# Altium PCB MinSystem.PcbDoc
Units mil, origin at the board's own origin, x right, y up, seen from the top; angles counter-clockwise.
Board outline 2240 x 2025 mil, 2 copper layers (Top Layer, Bottom Layer); 36 components, 50 nets, 170 pads, 8 vias.
Unrouted connection lines stored in the file: 48.
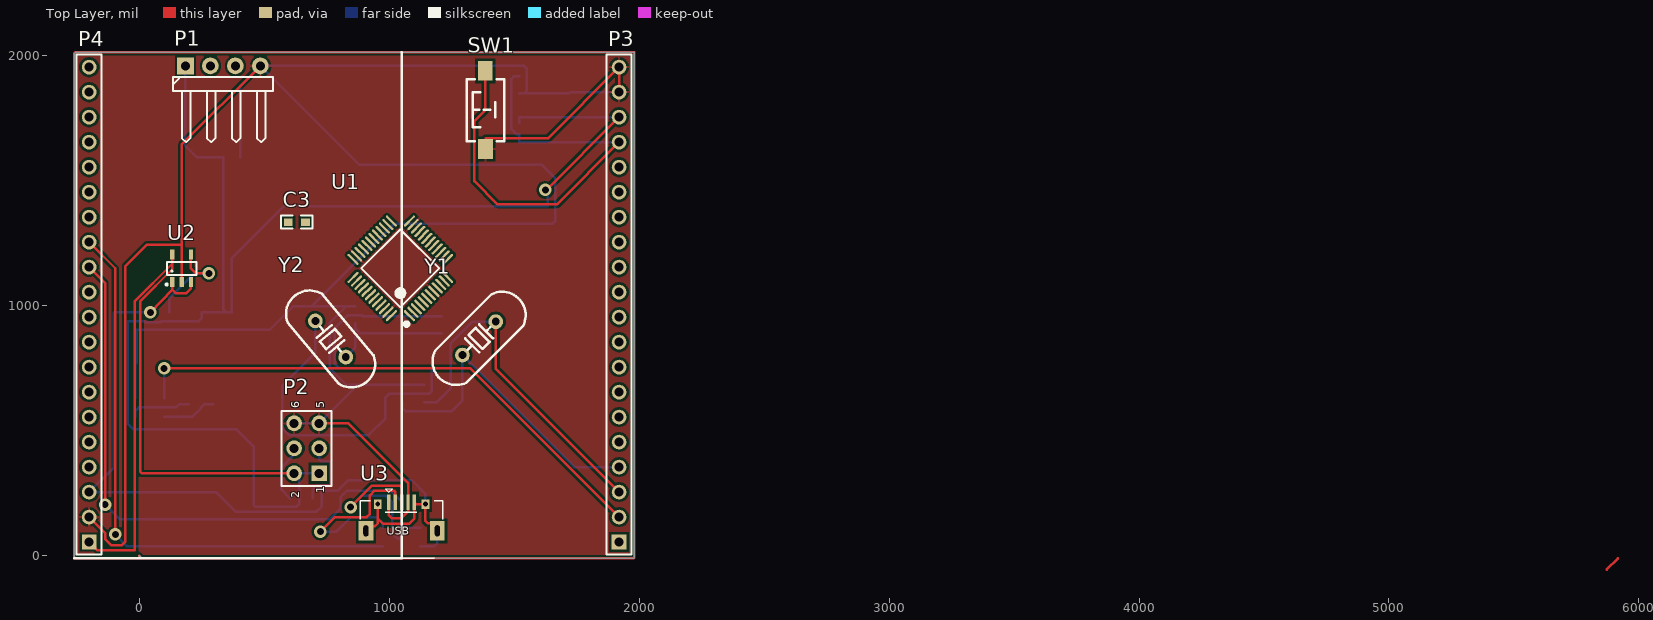
[diagram p0: Top Layer view]
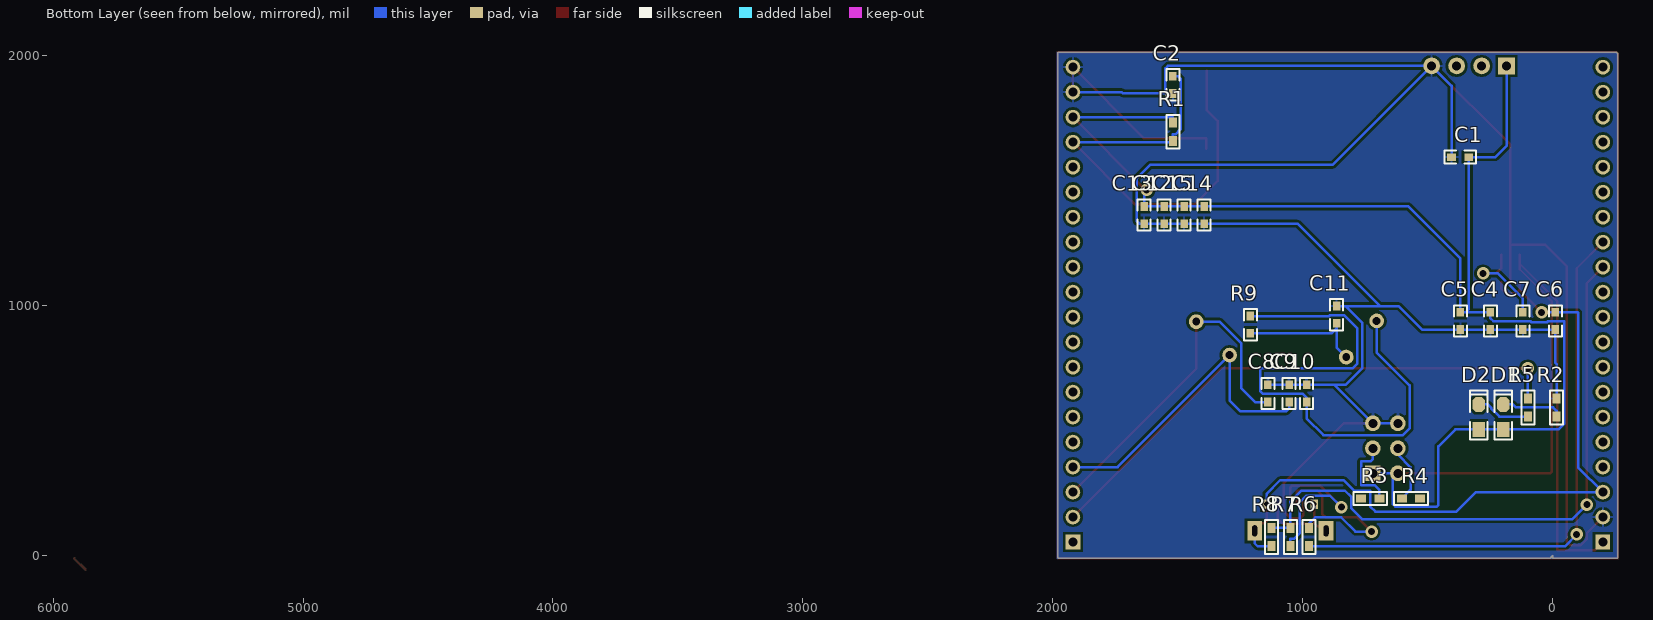
[diagram p1: Bottom Layer view, seen from below]

## Layer stack, top to bottom
Top Solder: solder mask 0.4, Solder Resist, Dk 3.5
Top Layer: signal copper 1.4
Dielectric 1: dielectric 12.6, FR-4, Dk 4.8
Bottom Layer: signal copper 1.4
Bottom Solder: solder mask 0.4, Solder Resist, Dk 3.5

## Board outline
-260,-10 -260,2010 -255,2015 1980,2015 1980,-8.5 1978.5,-10 10,-10 0,0 0,-10

## Design rules (kind name [scope] priority, off if disabled: settings)
Clearance [All] p1: gap=10 ignorepadtopadclearanceinfootprint=FALSE except(0: Arc-Hole Track-Hole SMDPad-Hole THPad-Hole Via-Hole Fill-Hole Poly-Hole Region-Hole Text-Hole)
PolygonConnect [All] p1: connectstyle=Relief reliefconductorwidth=10 reliefentries=4 polygonreliefangle="90 Angle" airgapwidth=10
RoutingVias [All] p1: holewidth=28 width=50 viastyle="Through Hole" minholewidth=28 minwidth=50 maxholewidth=28 maxwidth=50
SolderMaskExpansion [All] p1: expansion=4 istentingtop=FALSE
Width [All] p1: maxlimit=10 minlimit=10 preferedwidth=10
30 further rules are at their usual default settings.

## Components (designator, comment, footprint, x,y, rotation, side; value= is the part's Value field where it differs from the comment)
C1 "105 C0603" "C 0603" 370,1595 r180 bottom value=104
C2 "105 C0603" "C 0603" 1520,1885 r90 bottom value=104
C3 "105 C0603" "C 0603" 631,1335 r0 top value=104
C4 "105 C0603" "C 0603" 249.5,940 r90 bottom value=104
C5 "105 C0603" "C 0603" 369.5,940 r90 bottom value=104
C6 "105 C0603" "C 0603" -10.5,940 r90 bottom value=104
C7 "105 C0603" "C 0603" 119.5,940 r90 bottom value=104
C8 "22P,0603" "C 0603" 1140,650 r90 bottom value=104
C9 "22P,0603" "C 0603" 1055,650 r90 bottom value=104
C10 "22P,0603" "C 0603" 985,650 r90 bottom value=104
C11 "22P,0603" "C 0603" 865,965 r90 bottom value=104
C12 "105 C0603" "C 0603" 1555,1364 r90 bottom value=104
C13 "105 C0603" "C 0603" 1635,1364 r90 bottom value=104
C14 "105 C0603" "C 0603" 1395,1364 r90 bottom value=104
C15 "105 C0603" "C 0603" 1475,1364 r90 bottom value=104
D1 "LED" "LED 0805G" 198,556 r90 bottom
D2 "LED" "LED 0805G" 296,556 r90 bottom
P1 "SWD" HDR-1X4_H 185,1960 r0 top
P2 "Header 3X2" HDR-3X2 720,330 r90 top
P3 "Header 20" HDR1X20 1920,55 r90 top locked
P4 "Header 20" HDR1X20 -200,55 r90 top locked
R1 "10K R0603" "R 0603" 1520,1696.5 r90 bottom
R2 "10K R0603" "R 0603" -15,593.5 r90 bottom
R3 "10K R0603" "R 0603" 730.63,230 r180 bottom
R4 "10K R0603" "R 0603" 567.63,230 r180 bottom
R5 "10K R0603" "R 0603" 100,593.5 r90 bottom
R6 "20R,0603" "R 0603" 975,75 r270 bottom
R7 "20R0603" "R 0603" 1050,75 r90 bottom
R8 "4.7K,0603" "R 0603" 1125,75 r90 bottom
R9 "1M0603" "C 0603" 1210,925 r90 bottom
SW1 "SW-PB_V" "TSW SMD-3*6*2.5" 1385,1785 r90 top
U1 "stm32f103c8t6_48pin" "TQFP48 7x7_L" 1045,1150 r45 top
U2 "RT9193" SOT23-5L 170,1150 r0 top
U3 "USB-mrico" USB-micro_B 1050,100 r0 top
Y1 "32.768K" "XTAL-49S DIP" 1360,870 r45 top
Y2 "8M" "XTAL-49S DIP" 765.74,867.62 r130 top

## Footprints (in the part's own frame and the unit in brackets; to place one, negate y for a bottom-side part, rotate by r counter-clockwise, add the part's x,y. Pads: shape width x height; smd on the part's side, far side on the other; paste and mask are expansions set on the pad)
"C 0603" [mil] "无极性贴片电容"
  rect 35x30 smd: 1(-35,0) 2(34,0)
  silkscreen extent -63,-26 62,26, body extent -31,-16 31,16, height 32
HDR1X20 [mm] "Connector; Header; 20 Position"
  rect 1.5x1.5 hole 0.9: 1(0,0)
  round 1.5 hole 0.9: 2(2.54,0) 3(5.08,0) 4(7.62,0) 5(10.16,0) 6(12.7,0) 7(15.24,0) 8(17.78,0) 9(20.32,0) 10(22.86,0) 11(25.4,0) 12(27.94,0) 13(30.48,0) 14(33.02,0) 15(35.56,0) 16(38.1,0) 17(40.64,0) 18(43.18,0) 19(45.72,0) 20(48.26,0)
  silkscreen extent -1.27,-1.27 49.53,1.27
HDR-1X4_H [mm] "弯脚排针，4脚"
  rect 1.7x1.7 hole 0.9: 1(0,0)
  round 1.7 hole 0.9: 2(2.54,0) 3(5.08,0) 4(7.62,0)
  silkscreen extent -1.27,-7.76 8.89,-1.14, body extent -1.27,-7.77 8.89,1.27, height 4.85
HDR-3X2 [mm] "双排排针，3x2脚"
  rect 1.6x1.6 hole 0.9: 1(0,0)
  round 1.6 hole 0.9: 2(0,2.54) 3(2.54,0) 4(2.54,2.54) 5(5.08,0) 6(5.08,2.54)
  silkscreen extent -1.27,-1.27 6.35,3.81, body extent -1.27,-1.27 6.35,3.81, height 8.5
"LED 0805G" [mil] "绿色0805LED"
  rect 60x50 smd: 1(-50,0)
  oct 60x50 smd: 2(50,0)
  silkscreen extent -90,-35 105,35, body extent -39,-25 39,25, height 32
"R 0603" [mil] "1/10W贴片电阻"
  rect 40x31.5 smd: 1(-36.5,0) 2(36.5,0)
  silkscreen extent -68,-26 68,26, body extent -31,-16 31,16, height 16
SOT23-5L [mm] "3x1.6x1.1mm(长宽高)"
  rect 0.45x1 smd: 1(-0.95,-1.4) 2(0,-1.4) 3(0.95,-1.4) 4(0.95,1.4) 5(-0.95,1.4)
  silkscreen extent -1.6,-1.73 1.5,0.66, body extent -1.5,-1.4 1.5,1.4, height 1.15
"TQFP48 7x7_L" [mm] "48脚，体宽：7x7mm, 脚距：0.5mm"
  oval 0.25x1.5 smd: 1(-2.75,-4.046) 2(-2.25,-4.046) 3(-1.75,-4.046) 4(-1.25,-4.046) 5(-0.75,-4.046) 6(-0.25,-4.046) 7(0.25,-4.046) 8(0.75,-4.046) 9(1.25,-4.046) 10(1.75,-4.046) 11(2.25,-4.046) 12(2.75,-4.046) 25(2.75,4.046) 26(2.25,4.046) 27(1.75,4.046) 28(1.25,4.046) 29(0.75,4.046) 30(0.25,4.046) 31(-0.25,4.046) 32(-0.75,4.046) 33(-1.25,4.046) 34(-1.75,4.046) 35(-2.25,4.046) 36(-2.75,4.046)
  oval 1.5x0.25 smd: 13(4.046,-2.75) 14(4.046,-2.25) 15(4.046,-1.75) 16(4.046,-1.25) 17(4.046,-0.75) 18(4.046,-0.25) 19(4.046,0.25) 20(4.046,0.75) 21(4.046,1.25) 22(4.046,1.75) 23(4.046,2.25) 24(4.046,2.75) 37(-4.046,2.75) 38(-4.046,2.25) 39(-4.046,1.75) 40(-4.046,1.25) 41(-4.046,0.75) 42(-4.046,0.25) 43(-4.046,-0.25) 44(-4.046,-0.75) 45(-4.046,-1.25) 46(-4.046,-1.75) 47(-4.046,-2.25) 48(-4.046,-2.75)
  silkscreen extent -3.68,-4.57 2.79,2.79, body extent -4.5,-4.5 4.5,4.5, height 1.05
"TSW SMD-3*6*2.5" [mm] "3*6*2.5mm"
  rect 2x1.5 smd: 1(-3.996,-0.02) 2(3.937,0)
  silkscreen extent -3.21,-1.9 3.09,1.9, body extent -4,-1.88 4,1.62, height 2.59
USB-micro_B [mm] "micro型USB ，5.7*7.8*2.5mm"
  rect 0.35x1.6 smd: 1(-1.3,2.9) 2(-0.65,2.9) 3(0,2.9) 4(0.65,2.9) 5(1.3,2.9)
  rect 1.5x2 hole 0.5 slot 1.1 at 90 deg: 5(-3.625,0) 5(3.625,0)
  rect 0.8x1 hole 0.5: 5(-2.425,2.71) 5(2.425,2.71)
  silkscreen extent -4.19,-2.79 4.19,4.3, body extent -4,-2.71 4,2.89, height 2.8
"XTAL-49S DIP" [mm]
  round 1.5 hole 0.8: 1(-2.4,0) 2(2.4,0)
  silkscreen extent -5.7,-2.28 5.7,2.28, body extent -5.68,-2.35 5.68,2.3, height 3.5

## Part data
C1 C2 C3 C4 C5 C6 C7 C12 C13 C14 C15: library part Cap, LatestRevisionDate=17-Jul-2002, LatestRevisionNote="Re-released for DXP Platform.", Published=8-Jun-2000, Publisher="Altium Limited"
C8 C9 C10 C11: library part Cap, "Capacitor", LatestRevisionDate=17-Jul-2002, LatestRevisionNote="Re-released for DXP Platform.", Published=8-Jun-2000, Publisher="Altium Limited"
P1: library part "Header 4", "Header, 4-Pin", LatestRevisionDate=17-Jul-2002, LatestRevisionNote="Re-released for DXP Platform.", Publisher="Altium Limited"
P2: "Header, 3-Pin, Dual row", LatestRevisionDate=17-Jul-2002, LatestRevisionNote="Re-released for DXP Platform.", Publisher="Altium Limited"
P3 P4: library part "Header1* 20", LatestRevisionDate=17-Jul-2002, LatestRevisionNote="Re-released for DXP Platform.", Publisher="Altium Limited"
R1 R2 R3 R4 R5: library part Res2, LatestRevisionDate=17-Jul-2002, LatestRevisionNote="Re-released for DXP Platform.", Published=8-Jun-2000, Publisher="Altium Limited"
R6 R7 R8 R9: library part Res2, "Resistor", LatestRevisionDate=17-Jul-2002, LatestRevisionNote="Re-released for DXP Platform.", Published=8-Jun-2000, Publisher="Altium Limited"
U2: library part RT9193X_5P, ICA_MFR_NAME=RICHTEK, ICA_PARTNUM=$$2191094$$RT9193-15CU5, Part Number=TMP-13
U3: library part usb-STM
Y1 Y2: library part XTAL, "Crystal Oscillator", LatestRevisionDate=17-Jul-2002, LatestRevisionNote="Re-released for DXP Platform.", Published=8-Jun-2000, Publisher="Altium Limited"

## Via types
v1: diameter 50, hole 28, Top Layer to Bottom Layer, 8 vias

## Nets (pads, with @x,y where several pads share a name; then routed paths per layer and width w, separated by ;. In a path a pad name is that pad's centre, name@x,y a point inside that pad or via, vN(x,y) a via of type N, cw(c..) or ccw(c..) an arc to the next point about the centre after c; other vN are vias at no path point)
5V: C6.2 P4.3 R8.1 U2.1 U2.3 U3.5 | length 3400.6
  Top Layer w10: v1(45,974) 132.6,1064.8 ; U2.1 132.6,1064.8 ; U2.3 207.4,1070 187.4,1050 147.4,1050 132.6,1064.8 ; U3.5@907.28,100 907.28,117.65 942.18,117.65 954.53,130 954.53,150 ; U3.5@954.53,206.69 954.53,150 ; U3.5@1192.72,100 1192.72,130 1155.47,130 1145.47,140 1145.47,206.69 1108.66,206.69 1101.18,214.17 1101.18,150 1079.18,128 976.53,128 954.53,150
  Bottom Layer w10: v1(45,974) C6.2 -99,974 -101,972 -101,354 P4.3 308,255 386,177 710,177 731,198 731,261 795,261 837,303 1090.47,303 1145.47,248 U3.5@1145.47,206.69 ; R8.1 1125,38 1180.72,38 1192.72,50 U3.5@1192.72,100
BOOT0: R3.1 U1.44
BOOT1: R4.2 U1.20
GND: C1.1 C2.1 C4.1 C5.1 C6.1 C7.1 C8.2 C9.2 C10.2 C11.2 C12.1 C13.1 C14.1 C15.1 P1.4 P2.5 P2.6 P3.19 P3.20 P4.2 R2.2 SW1.1 U1.8 U1.23 U1.35 U1.47 U2.2 U3.1 U3.4 | length 10893.2
  Top Layer w10: P4.2 -136,91 -136,68 -110,42 -70,42 -55,57 -55,1159 31,1245 168,1245 170,1243 ; U2.2 170,1243 ; P1.4 170,1645 170,1243 ; P2.5 837.45,530 1075.59,291.86 U3.4 1075.59,176.59 1050,151 1010,151 998.82,162.18 U3.1 ; SW1.1 1385.79,1670 1635,1670 P3.20 P3.19
  Bottom Layer w10: R2.2 -15,767 -10.5,771.5 C6.1 C7.1 C4.1 C5.1 523,905 617,999 692,999 ; C1.1 405,1880 P1.4 ; P2.6 P2.5 874,684 ; C11.2 830,999 ; C8.2 C9.2 C10.2 874,684 ; C2.1 1540,1850 ; P3.19 1725,1855 1720,1850 1540,1850 ; P1.4 881,1564 1611,1564 1665,1510 1665,1340 1654,1329 C13.1 C12.1 C15.1 C14.1 1022,1329 692,999 ; P1.4 1540,1960 1550,1950 1550,1860 1540,1850 ; 692,999 830,999 ; 830,999 761.94,930.94 761.94,752.06 830,684 874,684
NetC7_2: C7.2 U2.4 | length 391.9
  Top Layer w10: U2.4 207.4,1150 227.4,1130 v1(279,1130)
  Bottom Layer w10: C7.2 119.5,1030 219.5,1130 v1(279,1130)
NetD1_2: D1.2 R2.1 | length 246.8
  Bottom Layer w10: R2.1 -15,580 -1,594 148,594 160,606 D1.2
NetD2_2: D2.2 R5.1 | length 218.1
  Bottom Layer w10: R5.1 214,557 247,590 247,593 260,606 D2.2
NetP2_3: P2.3 R3.2 | length 303.1
  Bottom Layer w10: R3.2 694,230 694,263.86 713.14,283 767,283 767,378 730,378 720,388 P2.3
NetP2_4: P2.4 R4.1 | length 235.7
  Bottom Layer w10: R4.1 569,265.13 569,354 620,405 P2.4
NetR6_1: R6.1 U3.2 | length 757.4
  Top Layer w10: v1(725,97) 783,155 910,155 923,168 923,242 941.67,260.67 1021,260.67 1024.41,257.26 U3.2
  Bottom Layer w10: v1(725,97) 789.63,97 847,154.37 950.63,154.37 975,130 R6.1
NetR7_1: R7.1 U3.3 | length 699.1
  Top Layer w10: v1(846,195) 931.67,280.67 1043.5,280.67 1050,274.17 U3.3
  Bottom Layer w10: v1(846,195) 892.38,241.38 985.28,241.38 1013,213.65 1013,90 1035,68 1050,68 R7.1
OSCIN: C10.1 R9.2 U1.5 Y2.2 | length 2294.7
  Bottom Layer w10: Y2.2 705,814 573,682 573,510 600,483 918,483 985,550 C10.1 985,633 1000,648 1160,648 1170,658 1170,750 1169.29,750.71 800,750.71 781.94,768.76 781.94,909.94 835,963 891,963 895,959 R9.2
OSCOUT: C11.1 R9.1 U1.6 Y2.1 | length 504
  Bottom Layer w10: Y2.1 865,833.76 865,910 ; C11.1 865,910 ; R9.1 885,890 865,910
PA0: P3.5 U1.10
PA1: P3.6 U1.11
PA2: P3.7 U1.12
PA3: P3.8 U1.13
PA4: P3.9 U1.14
PA5: P3.10 U1.15
PA6: P3.11 U1.16
PA7: P3.12 U1.17
PA8: P4.16 U1.29
PA9: P4.15 U1.30
PA10: P4.14 U1.31
PA11: P4.13 R6.2 U1.32 | length 2303.5
  Top Layer w10: P4.13 -95.47,1150.47 v1(-95.47,85.47)
  Bottom Layer w10: v1(-95.47,85.47) -48,38 975,38 R6.2
PA12: P4.12 R7.2 R8.2 U1.33 | length 2459
  Top Layer w10: P4.12 -136,1091 v1(-136,205)
  Bottom Layer w10: v1(-136,205) -78,147 763,147 806,190 806,235 832.38,261.38 1005.28,261.38 1050,216.65 R7.2 R8.2
PA15: P4.11 U1.38
PB0: P3.13 U1.18
PB1: P3.14 U1.19
PB3: P4.10 U1.39
PB4: P4.9 U1.40
PB5: P4.8 U1.41
PB6: P4.7 U1.42
PB7: P4.6 U1.43
PB8: P4.5 U1.45
PB9: P4.4 U1.46
PB10: P3.15 U1.21
PB11: P3.16 U1.22
PB12: P4.20 U1.25
PB13: P4.19 U1.26
PB14: P4.18 U1.27
PB15: P4.17 U1.28
PC13: P3.2 R5.2 U1.2 | length 2186.5
  Top Layer w10: v1(100,750) 1325,750 P3.2
  Bottom Layer w10: R5.2 v1(100,750)
PC14: C8.1 P3.3 U1.3 Y1.2 | length 1411.7
  Top Layer w10: Y1.2 1426.81,748.19 P3.3
  Bottom Layer w10: C8.1 1191,615 1246,670 1246,850 1332.81,936.81 Y1.2
PC15: C9.1 P3.4 U1.4 Y1.1 | length 1280.5
  Bottom Layer w10: C9.1 1055,590 1067,578 1250,578 1293.19,621.19 Y1.1 1741.37,355 P3.4
RESET: C2.2 P3.17 R1.1 SW1.2 U1.7 | length 1887.1
  Top Layer w10: SW1.2 1385,1784 1341,1740 1341,1499 1434,1406 1671,1406 P3.17
  Bottom Layer w10: C2.2 1500,1919 1489,1908 1489,1707 1510,1686 1520,1686 R1.1 1520,1655 P3.17
SWDCLK: P1.3 U1.37
SWDIO: P1.2 U1.34
VBAT: P3.1 U1.1
VCC3V3: C1.2 C4.2 C5.2 C12.2 C13.2 C14.2 C15.2 D1.1 D2.1 P1.1 P2.1 P2.2 P3.18 P4.1 R1.2 U1.9 U1.24 U1.36 U1.48 U2.5 | length 8589.3
  Top Layer w10: P4.1 -166.4,21.4 -18.6,21.4 -17,23 -17,1019 132.6,1168.6 ; U2.5 132.6,1168.6 ; P2.2 10.86,330 5,335.86 5,1019 132.6,1146.6 132.6,1168.6 ; v1(1625,1464) 1629,1464 P3.18
  Bottom Layer w10: P1.1 185,1640 230,1595 C1.2 336,988 350,974 ; P2.1 P2.2 640,310 640,207 630,197 463.86,197 458,202.86 458,438 390,506 D2.1 D1.1 -22,506 -46,530 -46,938 20,938 24,934 85,934 90,939 238.5,939 249.5,950 C4.2 350,974 ; R1.2 1520,1755 P3.18 ; v1(1625,1464) 1635,1454 C13.2 1595,1398 C12.2 1515,1398 C15.2 1435,1398 C14.2 577.5,1398 369.5,1190 C5.2 350,974
pads on no net: C3.1 C3.2
copper on no net: | length 8737.7
  Top Layer w10: 0,-10 0,0 10,-10 1978.5,-10 1980,-8.5 1980,2015 490,2015 -255,2015 -260,2010 -260,-10 133.7,-10 ; 5870.51,-55 5915.51,-10

## Polygon pours and split planes (outlines as drawn)
GND on Top Layer "GND_L01_P000" (solid, remove dead copper, pour order 0): -260,2015 1980,2015 1980,-10 -260,-10
GND on Bottom Layer "GND_L02_P001" (solid, remove dead copper, pour order 1): -254.74,2014.14 1985.26,2014.14 1985.26,-10.86 -254.74,-10.86

## Silkscreen, mask and mechanical layers (free items; w line width, h text height)
Top Overlay:
  lines w10: -260,-10 1050,-10 1050,2015

## Text inside footprints (layer, text, board x,y; h text height)
P2: Top Overlay "1" at 740,250 h32 r90; Top Overlay "2" at 640,230 h32 r90; Top Overlay "5" at 740,590 h32 r90; Top Overlay "6" at 640,590 h32 r90
U3: Top Overlay "USB" at 990,84.17 h32